# EAGLE board avatar2 (EAGLE 7.6.0)
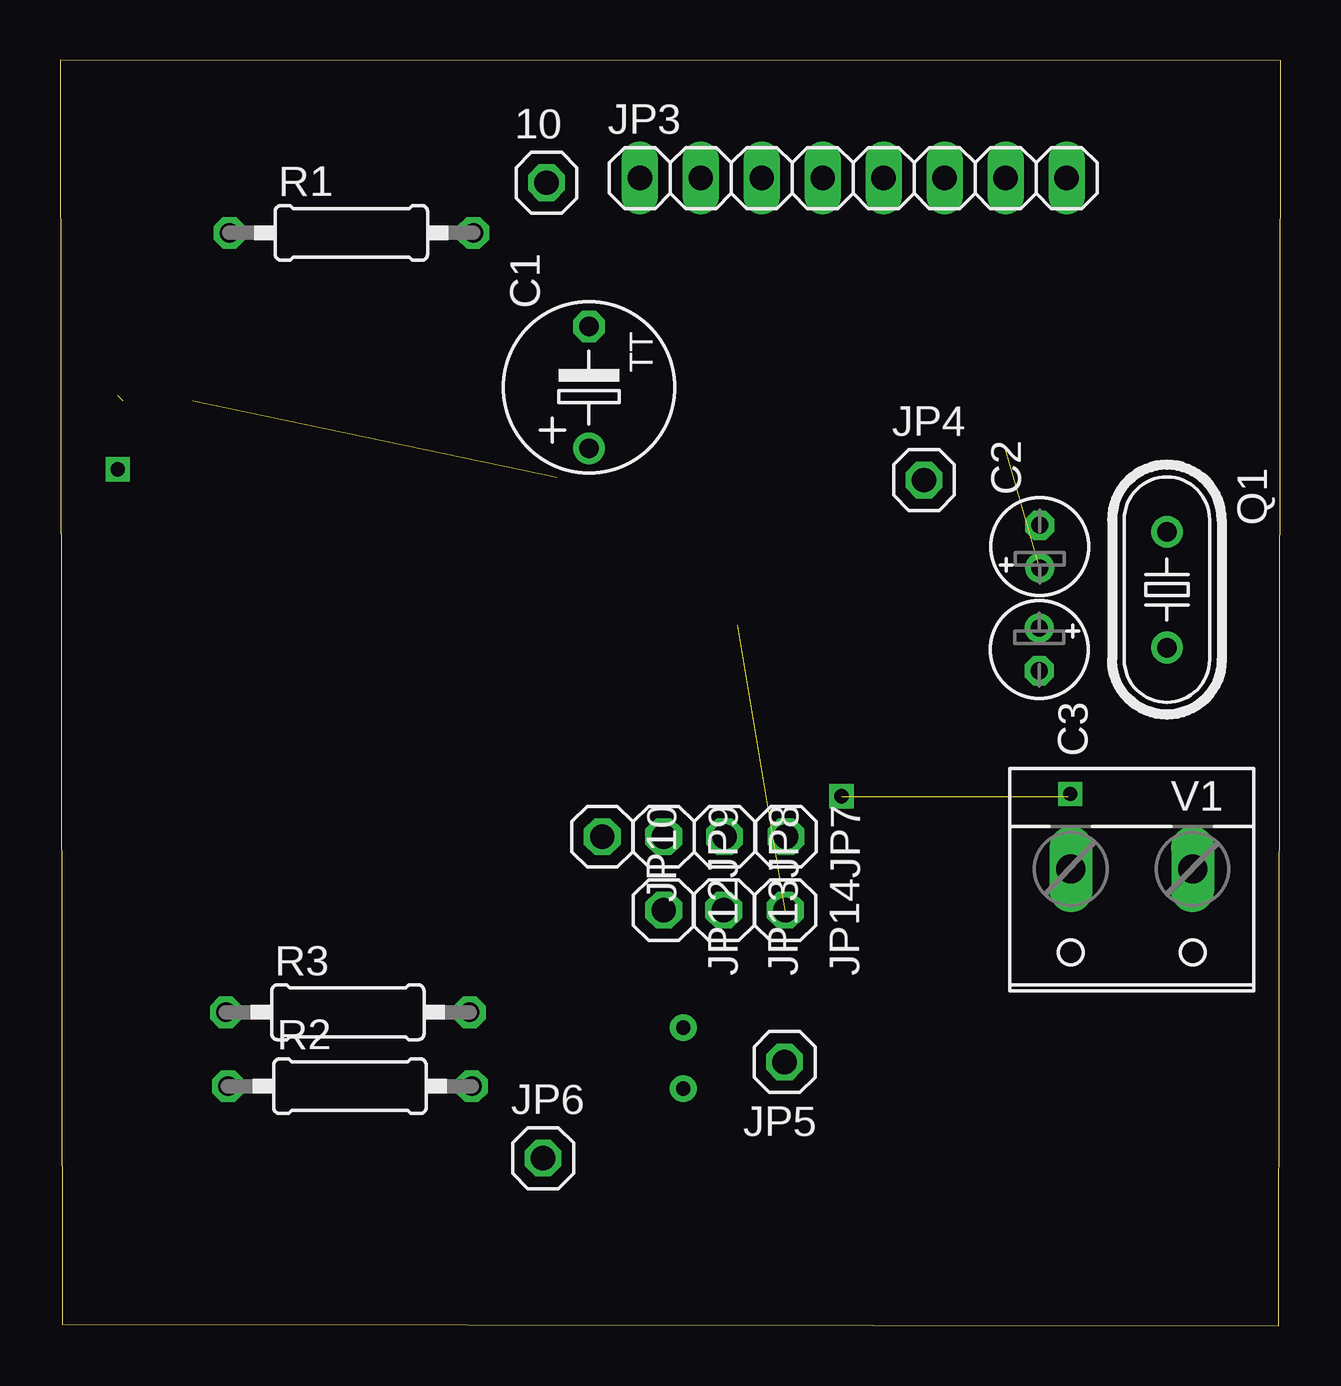
[diagram p0: board, top side]
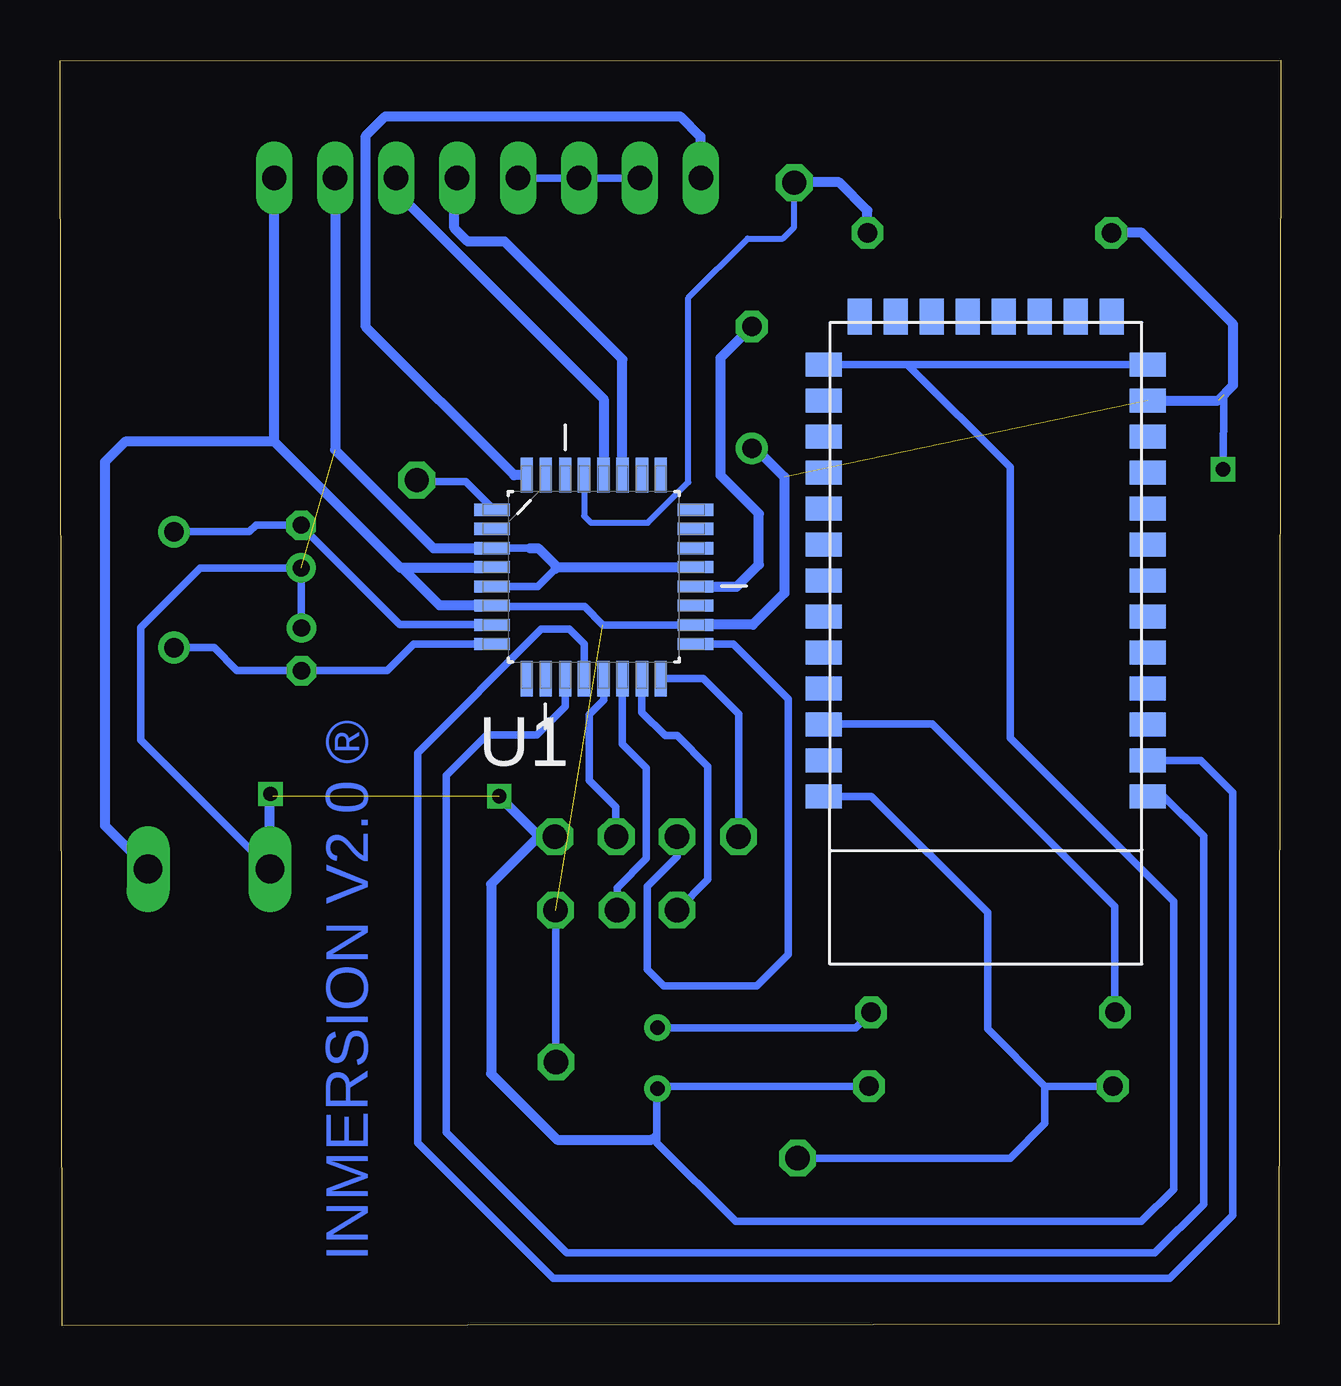
[diagram p1: board, bottom side, seen from below]

Size 50.87 x 52.75 mm. Coordinates in mm from the lower left corner, seen from the top.
Outline: 0.09,0.06 50.77,0 50.87,52.72 0,52.75 0.09,0.06
Copper layers (1*16): Top 0.035mm / dielectric 1.5mm / Bottom 0.035mm
Design rules "default": minimum track width 10mil, minimum drill 24mil, track to track 8mil, track to pad 8mil, pad to pad 8mil, via to via 8mil, smd to smd 8mil, copper to edge 40mil, drill to drill 8mil, minimum pad ring 10mil, minimum via ring 8mil, stop-mask expansion 4mil, vias tented up to drill 0mil, thermal gap 10mil

## Footprints (pad centres in the part's own frame; a part is rotated, then mirrored left to right if it is on the bottom)
1X01 = drill 1.016 octagon: 1 0,0
TT5D7 = drill 0.813: + -2.54,0 | drill 0.813 octagon: - 2.54,0
E1,8-4 = drill 0.711 pad 1.168: + -0.889,0 | drill 0.711 pad 1.168 octagon: - 0.889,0
BC04 = smd 1 x 1.5: P$1 7,-0.25; P$2 8.5,-0.25; P$3 10,-0.25; P$4 11.5,-0.25; P$5 13,-0.25; P$6 14.5,-0.25; P$7 16,-0.25; P$8 17.5,-0.25; P$9 19,-0.25; P$10 20.5,-0.25; P$11 22,-0.25; P$12 23.5,-0.25; P$13 25,-0.25; P$22 25,13.25; P$23 23.5,13.25; P$24 22,13.25; P$25 20.5,13.25; P$26 19,13.25; P$27 17.5,13.25; P$28 16,13.25; P$29 14.5,13.25; P$30 13,13.25; P$31 11.5,13.25; P$32 10,13.25; P$33 8.5,13.25; P$34 7,13.25 | smd 1.5 x 1: P$14 27,1.25; P$15 27,2.75; P$16 27,4.25; P$17 27,5.75; P$18 27,7.25; P$19 27,8.75; P$20 27,10.25; P$21 27,11.75
1X08 = drill 1.016 long: 1 -8.89,0; 2 -6.35,0; 3 -3.81,0; 4 -1.27,0; 5 1.27,0; 6 3.81,0; 7 6.35,0; 8 8.89,0
HC49U-V = drill 0.813: 1 -2.413,0; 2 2.413,0
0207/10 = drill 0.813 octagon: 1 -5.08,0; 2 5.08,0
QFP80P900X900X120-32N = smd 1.473 x 0.508: 1 -4.242,2.794; 2 -4.242,2.007; 3 -4.242,1.194; 4 -4.242,0.406; 5 -4.242,-0.406; 6 -4.242,-1.194; 7 -4.242,-2.007; 8 -4.242,-2.794; 17 4.242,-2.794; 18 4.242,-2.007; 19 4.242,-1.194; 20 4.242,-0.406; 21 4.242,0.406; 22 4.242,1.194; 23 4.242,2.007; 24 4.242,2.794 | smd 0.508 x 1.473: 9 -2.794,-4.242; 10 -2.007,-4.242; 11 -1.194,-4.242; 12 -0.406,-4.242; 13 0.406,-4.242; 14 1.194,-4.242; 15 2.007,-4.242; 16 2.794,-4.242; 25 2.794,4.242; 26 2.007,4.242; 27 1.194,4.242; 28 0.406,4.242; 29 -0.406,4.242; 30 -1.194,4.242; 31 -2.007,4.242; 32 -2.794,4.242
HLMP-1790 = drill 0.6: A -1.27,0; C 1.27,0
W237-132 = drill 1.194 long: 1 -2.54,-0.635; 2 2.54,-0.635

## Placement (x,y rotation side)
10  [1X01]  20.27,47.63 0 top
C1  [TT5D7]  22.04,39.1 90 top
C2  [E1,8-4]  40.82,32.47 90 top
C3  [E1,8-4]  40.8,28.18 270 top
IC1  [BC04]  5.79,15.06 90 bottom
JP3  [1X08]  33.05,47.83 0 top
JP4  [1X01]  36,35.24 0 top
JP5  [1X01]  30.19,10.98 180 top
JP6  [1X01]  20.13,6.97 0 top
JP7  [1X01]  30.25,20.38 270 top
JP8  [1X01]  27.69,20.38 270 top
JP9  [1X01]  25.16,20.38 270 top
JP10  [1X01]  22.59,20.38 270 top
JP12  [1X01]  25.16,17.31 270 top
JP13  [1X01]  27.66,17.31 270 top
JP14  [1X01]  30.22,17.31 270 top
Q1  [HC49U-V]  46.12,30.67 270 top
R1  [0207/10]  12.14,45.54 0 top
R2  [0207/10]  12.08,9.98 0 top
R3  [0207/10]  11.99,13.06 0 top
U1  ATMEGA328P-AU  [QFP80P900X900X120-32N]  28.62,31.21 0 bottom
U$1  LED  [HLMP-1790]  25.97,11.14 270 top
V1  [W237-132]  44.66,18.39 180 top

## Library data of the parts
10 JP3-JP10 JP12-JP14 = pinhead
C1 = resistor
C2 C3 = rcl
IC1 = bc04; IC: BC04
Q1 = crystal; OC_FARNELL: 1666969; OC_NEWARK: unknown
R1-R3 = eagle-ltspice; SPICEMODEL: NONE; SPICEPREFIX: R
U1 = Ava; DESCRIPTION: 8-bit Microcontroller with In-System Programmable Flash; MPN: ATMEGA328P-AU; OC_FARNELL: 1715486; OC_NEWARK: 14R4631; PACKAGE: TQFP-32; SUPPLIER: Atmel
U$1 = Ava
V1 = con-wago-508; OC_FARNELL: unknown; OC_NEWARK: unknown

## Nets
D2: JP3.1 U1.32
GND: C2.+ C3.+ IC1.P$13 IC1.P$22 JP3.7 JP7.1 R2.2 U1.3 U1.5 U1.21 U$1.C V1.2
LOADER3: 10.1 R1.2 U1.29
N$1: R3.2 U$1.A
N$2: JP4.1 U1.1
N$3: C1.- U1.20
NC: JP3.2 JP3.3 JP3.4
NRF1: JP10.1 U1.16
NRF2: JP9.1 U1.17
NRF3: JP8.1 U1.13
NRF6: JP12.1 U1.15
NRF7: JP13.1 U1.14
PIOK: IC1.P$34 JP6.1 R2.1
PIOL: IC1.P$32 R3.1
RX: IC1.P$2 U1.12
SCL: JP3.6 U1.28
SDA: JP3.5 U1.27
TX: IC1.P$1 U1.11
VCC: C1.+ IC1.P$12 JP3.8 JP5.1 JP14.1 R1.1 U1.4 U1.6 U1.18 V1.1
XTAL0: C2.- Q1.1 U1.7
XTAL1: C3.- Q1.2 U1.8

## Tracks (layer width: path | path; a pad name or v marks a point on that pad's centre or on a via)
D2
  Bottom 0.406: U1.32 31.95,35.45 38.13,41.62 38.13,49.59 37.31,50.41 25.03,50.41 24.19,49.56 24.19,47.86 JP3.1
GND  (via drill 0.6)  (2 unrouted)
  Top 0.406: 42,22.06 v42.09,22.16
  Bottom 0.305: IC1.P$13 15.56,40.06 | 15.56,40.06 IC1.P$22 | U1.3 31.28,32.4 | U1.21 25.22,31.61 | U1.5 30.97,30.8 30.22,31.55 | R2.2 25.86,9.98 U$1.C 26,9.84 26,7.97 | C3.+ 40.82,29.09 C2.+ 45.02,31.58 47.5,29.09 47.5,24.41 V1.2 | 15.56,40.06 11.28,35.78 11.28,24.5 4.47,17.69 4.47,5.69 5.81,4.34 22.72,4.34 26,7.62 26,7.97 | 26.22,7.75 26,7.97
  Bottom 0.406: JP3.7 39.4,36.49 35.31,32.41 32.87,32.41 U1.3 | 30.15,31.61 25.22,31.61 | 30.15,31.61 30.22,31.55 | 31.28,32.4 30.94,32.4 30.15,31.61 | 26.22,7.75 30.16,7.75 32.91,10.5 32.91,18.41 30.94,20.37 JP7.1 30.88,20.37 v32.56,22.06 | V1.2 42.12,22.13 v42.09,22.16
LOADER3
  Bottom 0.254: U1.29 29.03,33.75 28.75,33.47 26.38,33.47 24.69,35.16 24.69,42.84 22.22,45.31 20.75,45.31 20.28,45.78 10.1
  Bottom 0.406: R1.2 17.22,46.47 18.41,47.66 20.25,47.66 10.1
N$1
  Bottom 0.305: U$1.A 17.71,12.41 R3.2
N$2
  Bottom 0.305: U1.1 32.87,34.08 33.97,35.19 35.95,35.19 JP4.1
N$3
  Bottom 0.406: U1.20 22.67,30.8 21.75,31.72 21.75,33.84 23.34,35.44 23.34,40.34 C1.-
NC
  Bottom 0.305: JP3.4 JP3.3 JP3.2
NRF1
  Bottom 0.305: JP10.1 22.59,25.5 24.06,26.97 U1.16
NRF2
  Bottom 0.305: 25.16,20.34 JP9.1 25.16,19.56 26.41,18.31 26.41,14.84 25.72,14.16 21.84,14.16 20.53,15.47 20.53,26.12 22.81,28.41 U1.17
NRF3
  Bottom 0.305: U1.13 28.22,26.06 28.81,25.47 28.81,22.72 27.72,21.62 27.72,20.41 JP8.1
NRF6
  Bottom 0.305: 26.61,26.96 U1.15 26.63,25.56 25.66,24.59 25.16,24.59 23.88,23.31 23.88,18.59 JP12.1
NRF7
  Bottom 0.305: U1.14 | JP13.1 27.66,18.25 26.44,19.47 26.44,23.25 27.44,24.25 U1.14
PIOK
  Bottom 0.305: IC1.P$34 17.06,22.06 12.21,17.21 12.21,12.36 9.83,9.97 | 9.83,9.97 R2.1 6.97,9.95 | 9.83,9.97 9.83,8.42 11.28,6.97 JP6.1
PIOL
  Bottom 0.305: R3.1 6.91,17.47 14.52,25.08 19.03,25.08 IC1.P$32
RX
  Bottom 0.305: U1.12 29.03,28.41 29.66,29.03 30.81,29.03 35.97,23.87 35.97,7.62 30.31,1.97 4.63,1.97 2,4.59 2,22.22 3.34,23.56 IC1.P$2
SCL
  Bottom 0.406: U1.28 28.22,38.62 36.86,47.27 JP3.6
SDA
  Bottom 0.406: U1.27 27.43,40.27 32.34,45.19 33.88,45.19 34.44,45.75 34.44,47.71 JP3.5
TX
  Bottom 0.305: IC1.P$1 4.88,22.06 3.22,20.41 3.22,5.06 5.25,3.03 29.75,3.03 34.78,8.06 34.78,22.94 33.09,24.62 31,24.62 29.82,25.81 U1.11
VCC  (via drill 0.6)  (3 unrouted)
  Bottom 0.305: U1.18 28.24,29.2 29.01,29.96 32.82,29.96 U1.6 | 2.38,38.79 v2.41,35.69 | JP14.1 30.22,11.01 JP5.1
  Bottom 0.406: R1.1 5.79,45.54 1.98,41.73 1.98,39.19 2.61,38.56 IC1.P$12 | U1.6 35.04,30.01 36.63,31.59 | 36.63,31.59 32.88,31.59 U1.4 | 36.63,31.59 36.69,31.59 41.94,36.84 | 41.94,36.84 JP3.8 | 41.94,36.84 48.16,36.84 49,36 49,20.83 V1.1 | C1.+ 21.87,36.56 20.69,35.37 20.69,30.53 22,29.22 24.36,29.22 U1.18
XTAL0
  Bottom 0.305: 40.81,33.34 C2.- | Q1.1 42.98,33.08 42.69,33.37 40.84,33.37 C2.- | C2.- 40.82,33.32 36.72,29.22 32.89,29.22 U1.7
XTAL1
  Bottom 0.305: 40.22,27.29 C3.- | 40.22,27.29 37.24,27.29 36.13,28.41 U1.8 | Q1.2 44.45,28.26 43.5,27.31 40.24,27.31 40.22,27.29

## Text on the board
Bottom: INMERSION V2.0 ®